# Altium PCB DIP2350.PcbDoc (part 1 of 2)
Units mm, origin at the board's own origin, x right, y up, seen from the top; angles counter-clockwise.
Board outline 25.4 x 81.28 mm, 4 copper layers (Top Layer, Layer 1, Layer 2, Bottom Layer), stack 1.586 mm thick; 85 components, 93 nets, 372 pads, 127 vias.
Unrouted connection lines stored in the file: 5.
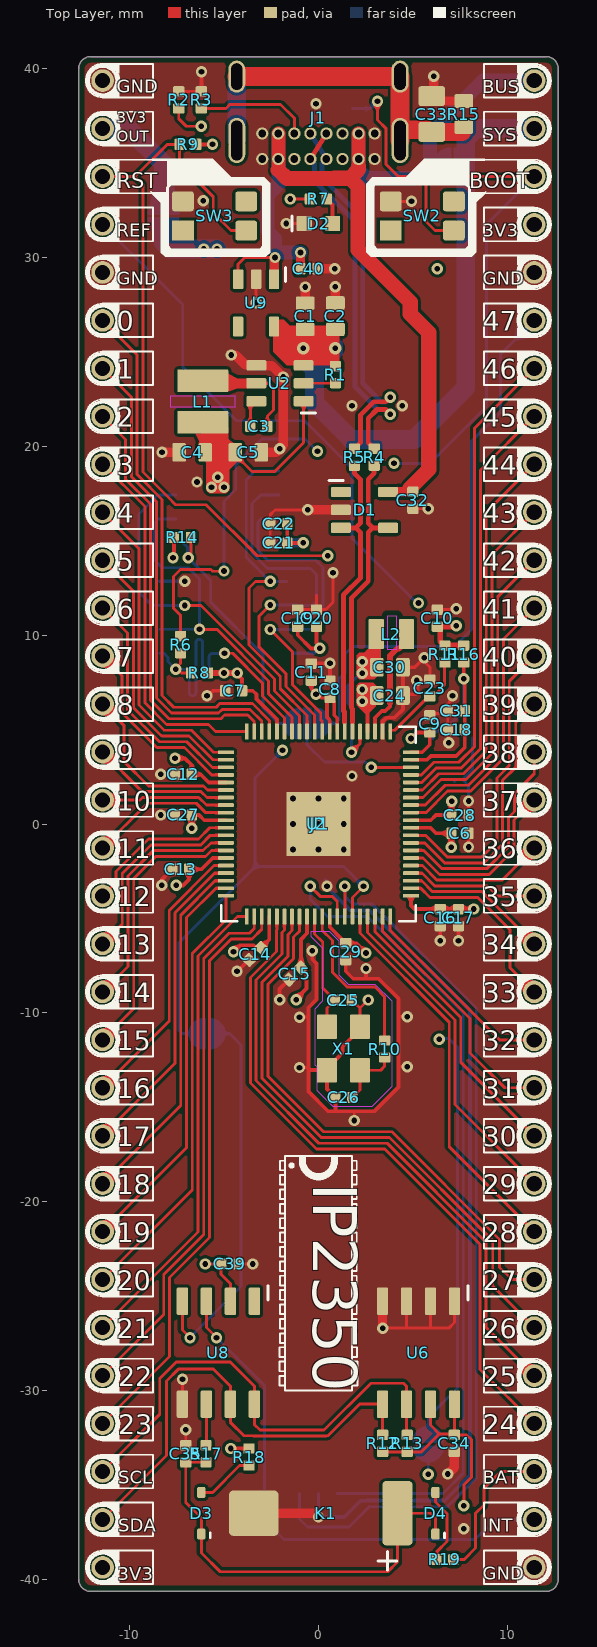
[diagram p0: Top Layer view]
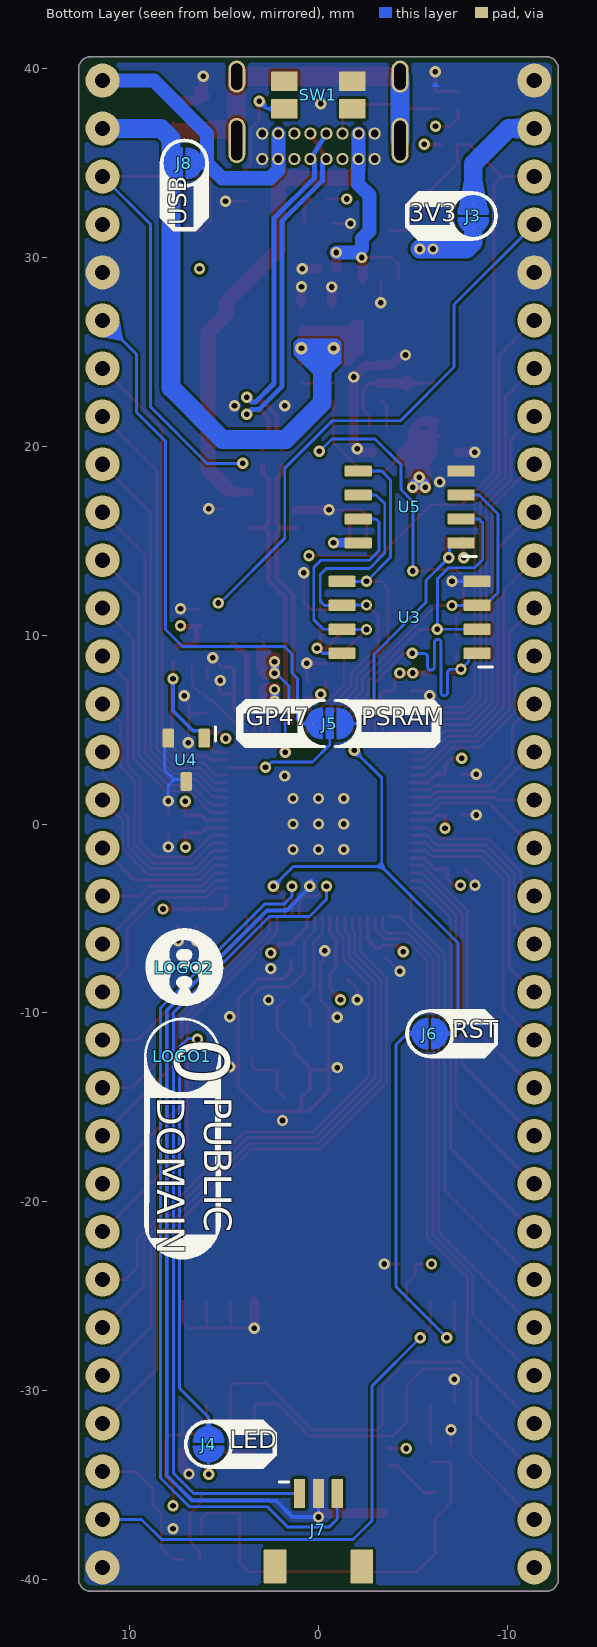
[diagram p1: Bottom Layer view, seen from below]
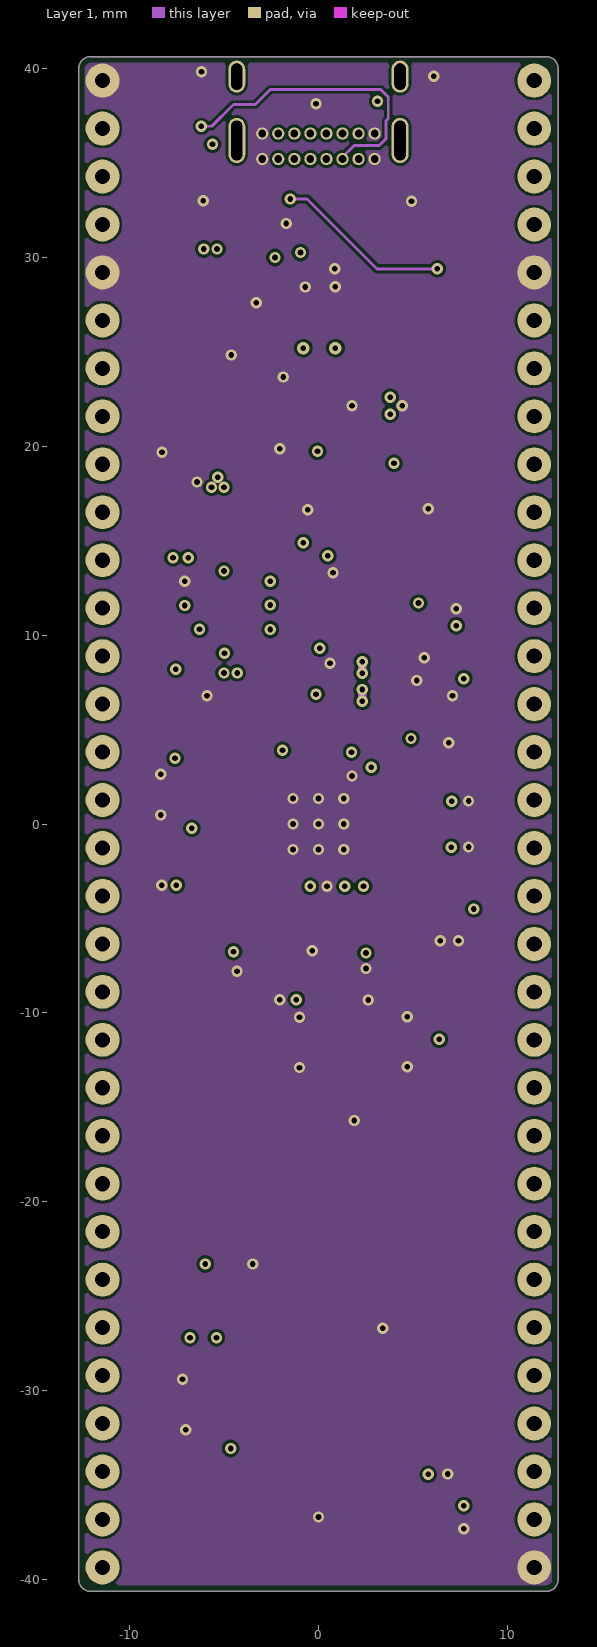
[diagram p2: Layer 1]
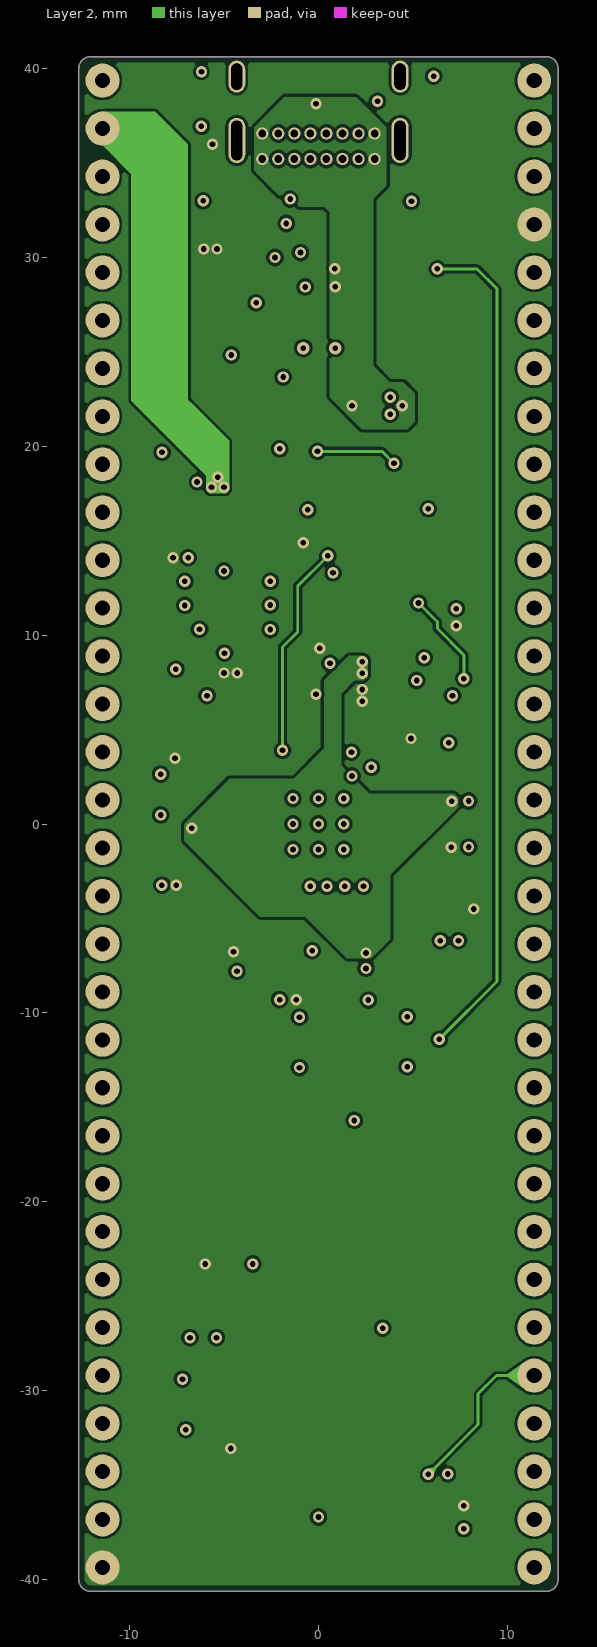
[diagram p3: Layer 2]
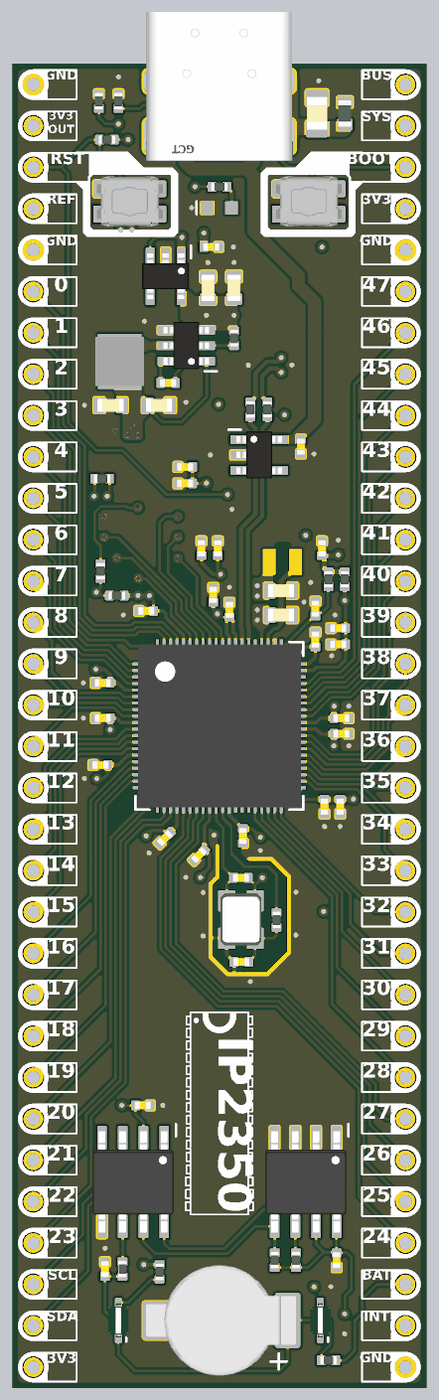
[diagram p5: 3D render of the assembled board from above, using the file's embedded part models]
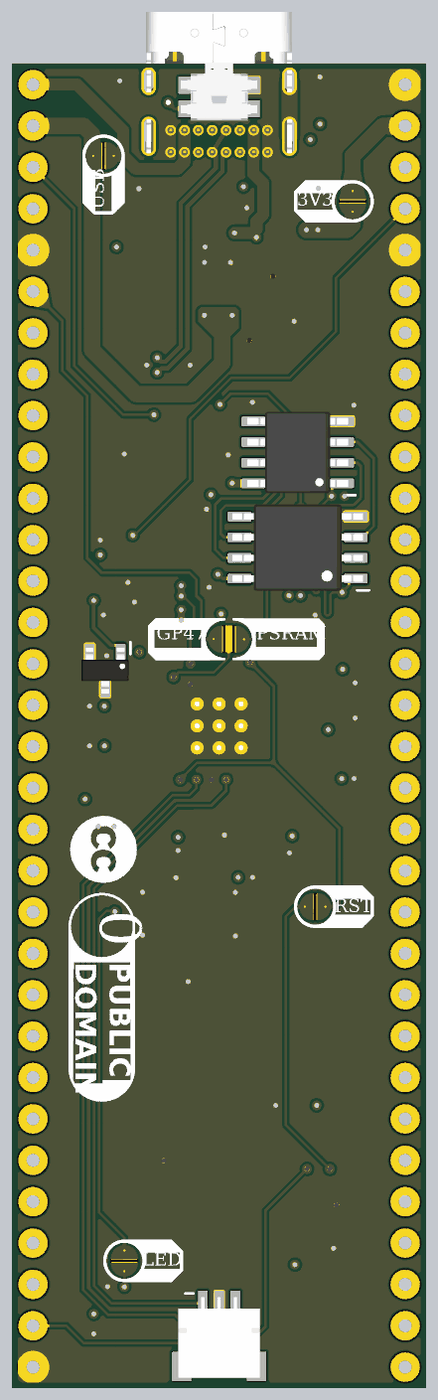
[diagram p6: 3D render of the assembled board from below, using the file's embedded part models]

## Layer stack, top to bottom
Top Solder: solder mask 0.01, Solder Resist, Dk 3.5
Top Layer: signal copper 0.035
Dielectric 2: prepreg 0.2104, 7628 * 1, Dk 4.1
Layer 1: signal copper 0.0152
Dielectric 1: dielectric 1.065, FR-4, Dk 4.8
Layer 2: signal copper 0.0152
Dielectric 3: prepreg 0.2104, 7628 * 1, Dk 4.1
Bottom Layer: signal copper 0.035
Bottom Solder: solder mask 0.01, Solder Resist, Dk 3.5

## Board outline
-12.7,-40.005 -12.7,40.005 cw(c-12.065,40.005) -12.065,40.64 12.065,40.64 cw(c12.065,40.005) 12.7,40.005 12.7,-40.005 cw(c12.065,-40.005) 12.065,-40.64 -12.065,-40.64 cw(c-12.065,-40.005)

## Design rules (kind name [scope] priority, off if disabled: settings)
Clearance Clearance_1 [All vs IsKeepOut] p1: gap=0.3 ignorepadtopadclearanceinfootprint=FALSE
Clearance [All] p2: gap=0.152 ignorepadtopadclearanceinfootprint=FALSE
ComponentClearance [All] p1 off: gap=0.254 collisioncheckmode=3 verticalgap=0.254 showdistances=FALSE
DiffPairsRouting [InDifferentialPairClass('USB')] p1: maxlimit=0.254 minlimit=0.152 mostfreqgap=0.254 toplayer_maxgap=0.152 toplayer_prefgap=0.152 toplayer_minwidth=0.152 toplayer_maxwidth=0.26 toplayer_prefwidth=0.26 bottomlayer_maxgap=0.152 bottomlayer_prefgap=0.152 bottomlayer_minwidth=0.152 bottomlayer_maxwidth=0.26 bottomlayer_prefwidth=0.26 impedanceprofiledriven=TRUE impedanceprofileid={392F3BA9-ACA7-47D8-8BB3-CF2CA6AB60A3} impedanceprofilevalue=90.000000 maxuncoupledlength=12.7
Length "Schematic Length Constraint" [InNetClass('QSPI')] p1: maxlimit=2540 minlimit=0 usedelayunits=TRUE mindelay=0.000000 maxdelay=500.000000
MatchedLengths "Schematic Matched Net Lengths" [InNetClass('QSPI')] p1: tolerance=2 checknetsindiffpair=FALSE checkdiffpairvsdiffpair=TRUE checkxsignals=TRUE checkothers=TRUE usedelayunits=TRUE delaytolerance=50.000000
MinimumSolderMaskSliver [All] p1: minsoldermaskwidth=0.099
PolygonConnect [All] p1: connectstyle=Direct reliefconductorwidth=0.254 reliefentries=4 polygonreliefangle="90 Angle" airgapwidth=0.254
RoutingVias [All] p1: holewidth=0.3 width=0.6 viastyle="Through Hole" minholewidth=0.2 minwidth=0.6 maxholewidth=2.54 maxwidth=3.81
SilkToSilkClearance [All] p1 off: silktosilkclearance=0.254
SilkToSolderMaskClearance [IsPad] p1: minsilkscreentomaskgap=0.05 clearancetoexposedcopper=TRUE
SolderMaskExpansion [All] p1: expansion=0.102 istentingtop=FALSE
SupplyNets "Schematic Supply Nets_9" [InNet('BOOT')] p1: voltage=0.000
SupplyNets "Schematic Supply Nets_8" [InNet('RST')] p2: voltage=0.000
SupplyNets "Schematic Supply Nets_4" [InNet('PSRAM')] p3: voltage=0.000
SupplyNets "Schematic Supply Nets_7" [InNet('P3V3')] p4: voltage=0.000
SupplyNets "Schematic Supply Nets_6" [InNet('VSYS')] p5: voltage=0.000
SupplyNets "Schematic Supply Nets_5" [InNet('VBUS')] p6: voltage=0.000
SupplyNets "Schematic Supply Nets" [InNet('SHLD')] p7: voltage=0.000
SupplyNets "Schematic Supply Nets_3" [InNet('GND')] p8: voltage=0.000
SupplyNets "Schematic Supply Nets_2" [InNet('P3V3OUT')] p9: voltage=0.000
SupplyNets "Schematic Supply Nets_1" [InNet('VREF')] p10: voltage=0.000
Width [All] p1: maxlimit=1 minlimit=0.152 preferedwidth=0.152
25 further rules are at their usual default settings.

## Classes and differential pairs
net class USB: P_N P_P U_N U_P
differential pair class USB: P U
net class QSPI: QCLK QSD0 QSD1 QSD2 QSD3 QSS
differential pair U: +U_P -U_N
differential pair P: +P_P -P_N

## Components (designator, comment, footprint, x,y, rotation, side; value= is the part's Value field where it differs from the comment)
C1 "CAP0603" CAPC0603 -0.7,26.89 r90 top
C2 "CAP0603" CAPC0603 0.9,26.9 r90 top
C3 "CAP0402" CAPC0402 -3.153,21.053 r180 top
C4 "CAP0603" CAPC0603 -6.684,19.682 r180 top
C5 "CAP0603" CAPC0603 -3.712,19.682 r0 top
C6 "CAP0402" CAPC0402 7.495,-0.489 r0 top locked
C7 "CAP0402" CAPC0402 -4.494,7.058 r180 top
C8 "CAP0402" CAPC0402 0.612,7.131 r90 top
C9 "CAP0402" CAPC0402 5.9,5.3 r90 top
C10 "CAP0402" CAPC0402 6.3,10.9 r90 top
C11 "CAP0402" CAPC0402 -0.379,8.046 r90 top
C12 "CAP0402" CAPC0402 -7.161,2.638 r180 top locked
C13 "CAP0402" CAPC0402 -7.3,-2.4 r180 top
C14 "CAP0402" CAPC0402 -3.351,-6.887 r225 top
C15 "CAP0402" CAPC0402 -1.242,-7.928 r225 top locked
C16 "CAP0402" CAPC0402 6.451,-4.956 r270 top
C17 "CAP0402" CAPC0402 7.416,-4.956 r270 top
C18 "CAP0402" CAPC0402 7.3,5 r180 top
C19 "CAP0402" CAPC0402 -1.1,10.9 r90 top
C20 "CAP0402" CAPC0402 -0.1,10.9 r90 top
C21 "CAP0402" CAPC0402 -2.101,14.884 r180 top
C22 "CAP0402" CAPC0402 -2.1,15.9 r180 top
C23 "CAP0402" CAPC0402 5.9,7.2 r90 top
C24 "CAP0603" CAPC0603 3.787,6.804 r0 top
C25 "CAP0603" CAPC0402 1.323,-9.325 r0 top locked
C26 "CAP0603" CAPC0402 1.348,-14.481 r180 top locked
C27 "CAP0402" CAPC0402 -7.161,0.479 r180 top locked
C28 "CAP0402" CAPC0402 7.495,0.476 r0 top locked
C29 "CAP0402" CAPC0402 1.45,-6.76 r270 top locked
C30 "CAP0603" CAPC0603 3.787,8.303 r0 top
C31 "CAP0402" CAPC0402 7.3,6 r180 top
C32 "CAP0402" CAPC0402 5.004,17.145 r270 top
C33 "CAP0805" CAPC0805 6,37.6 r90 top
C34 "CAP0402" CAPC0402 7.2,-32.8 r270 top
C35 "CAP0402" CAPC0402 -7.025,-33.35 r90 top
C39 "CAP0402" CAPC0402 -4.7,-23.3 r0 top
C40 "CAP0402" CAPC0402 -0.5,29.4 r0 top
D1 "TVS-WURTH-824011" SOT23-5 2.441,16.634 r0 top
D2 "BLUE" LED-0603-BLUE 0,31.8 r180 top
D3 "BAV116DW" SOD323 -6.2,-36.5 r90 top
D4 "BAV116DW" SOD323 6.2,-36.5 r90 top
J1 "CONN-USBC-USB2-HOR" CONN-GCT-USB4085 0,39.243 r180 top
J2 "CONN-DIP64-SOCKET" CONN-DIP64-SOCKET 0,0 r0 top locked
J3 "SOLDERPAD-2" SOLDERPAD-2 -8.2,32.2 r90 bottom
J4 "SOLDERPAD-2" SOLDERPAD-2 5.817,-32.842 r270 bottom
J5 "SOLDERPAD-3" SOLDERPAD-3 -0.6,5.321 r180 bottom
J6 "SOLDERPAD-2" SOLDERPAD-2 -5.9,-11.1 r0 bottom
J7 "SM03B" CONN-JST-SM03B-SRSS-TB 0,-37.9 r180 bottom
J8 "SOLDERPAD-2" SOLDERPAD-2 7.1,35 r180 bottom
K1 "MS621R" BAT-SEIKO-MS621R 0,-36.5 r180 top
L1 "4.7uH" IND-ABRACON-ASPI-3012S-3R9N-T -6.125,22.374 r270 top value=4u7H
L2 "AOTA-B201610S3R3-101-T" IND-ABRACON-B201610S3R3-101-T 3.863,10.055 r0 top value=3u3
LOGO1 "LOGO-LICENSE-CC0-PUBLIC" LOGO-LICENSE-CC0-PUBLIC 7.2,-12.3 r270 bottom
LOGO2 "LOGO-LICENSE-CC" LOGO-LICENSE-CC 7.1,-7.6 r270 bottom
R1 "RESC0402" RESC0402 0.9,23.8 r90 top value=1K
R2 "RESC0402" RESC0402 -7.4,38.35 r90 top value=5K1
R3 "RESC0402" RESC0402 -6.2,38.35 r90 top value=5K1
R4 "RESC0402" RESC0402 2.953,19.431 r270 top value=27R
R5 "RESC0402" RESC0402 1.907,19.428 r270 top value=27R
R6 "RESC0402" RESC0402 -7.3,9.5 r270 top value=1K
R7 "RESC0402" RESC0402 0,33.1 r0 top value=1K
R8 "RESC0402" RESC0402 -6.3,8 r0 top value=10K
R9 "RESC0402" RESC0402 -6.909,35.992 r0 top value=10K
R10 "RESC0402" RESC0402 3.507,-11.916 r90 top locked value=1K
R11 "RESC0402" RESC0402 6.7,9 r270 top value=33R
R12 "RESC0402" RESC0402 3.4,-32.8 r90 top value=4K7
R13 "RESC0402" RESC0402 4.7,-32.8 r90 top value=4K7
R14 "RESC0402" RESC0402 -7.2,15.175 r180 top value=10K
R15 "RESC0603" RESC0603 7.7,37.6 r90 top value=1M
R16 "RESC0402" RESC0402 7.7,9 r90 top value=33R
R17 "RESC0402" RESC0402 -5.95,-33.35 r270 top value=1K
R18 "RESC0402" RESC0402 -3.675,-33.525 r90 top value=1K
R19 "RESC0402" RESC0402 6.7,-38.95 r0 top value=1K
SW1 "SWITCH-E-SWITCH-TL1016" SWITCH-ESWITCH-TL1016 0,38.608 r0 bottom
SW2 "SWITCH-PANASONIC-EVP-AA202K" SWITCH-PANASONIC-EVP-AA202K 5.5,32.2 r0 top
SW3 "SWITCH-PANASONIC-EVP-AA202K" SWITCH-PANASONIC-EVP-AA202K -5.5,32.2 r0 top locked
U1 "IC-RP2350-DIP64" QFN40P1000X1000X90_HS-81N 0,0 r0 top locked
U2 "AP63203Q" SOT23-6 -2.036,23.339 r180 top
U3 "W25Q128JVSIQ" SO127P790-8N -4.826,10.947 r0 bottom locked
U4 "LM4040-3.0" SOT23 7,3.4 r270 bottom
U5 "APS6404L-3SQR-SN" SO127P600-8N -4.826,16.789 r0 bottom locked
U6 "FM24C64B-GTR" SO127P600-8N 5.3,-28 r270 top
U8 "DS3231M" SO127P600-8N -5.3,-28 r270 top
U9 "XC8110" SOT23-5 -3.3,27.6 r270 top
X1 "ABM8-272-T3" XTAL-ABRACON-ABM8-272-T3 1.323,-11.89 r0 top locked

## Footprints (in the part's own frame and the unit in brackets; to place one, negate y for a bottom-side part, rotate by r counter-clockwise, add the part's x,y. Pads: shape width x height; smd on the part's side, far side on the other; paste and mask are expansions set on the pad)
BAT-SEIKO-MS621R [mm]
  rrect25% 1.6x3.4 smd mask+0.05: 1(-4.187,0)
  rrect16% 2.6x2.4 smd mask+0.05: 2(3.425,0)
  silkscreen extent -4.15,2.02 -3.15,3.02, body extent -4.7,-3.4 4.5,3.4, height 2.57
CAPC0402 [mm] "CAPACITOR, CHIP 0402 (1005) 0.5MM THICK"
  rrect25% 0.55x0.6 smd paste+0 mask+0.075: 1(-0.45,0) 2(0.45,0)
  body extent -0.51,-0.25 0.51,0.26, height 0.52
CAPC0603 [mm] "CAPACITOR, CHIP 0603 (1608) 0.5MM THICK"
  rrect25% 0.72x0.99 smd paste+0 mask+0.075: 1(-0.69,0) 2(0.69,0)
  body extent -0.81,-0.41 0.81,0.41, height 0.51
CAPC0805 [mm] "CAPACITOR, CHIP 0805 (2012) 0.85MM THICK"
  rrect25% 1.05x1.4 smd paste+0 mask+0.075: 1(-0.95,0) 2(0.95,0)
  body extent -1.01,-0.63 1.01,0.64, height 0.86
CONN-DIP64-SOCKET [mm]
  round 1.2 / inner round 1.8 / far side round 1.8 hole 0.8 paste-2539.97 mask+0.1: 1(-11.43,39.37) 2(-11.43,36.83) 3(-11.43,34.29) 4(-11.43,31.75) 5(-11.43,29.21) 6(-11.43,26.67) 7(-11.43,24.13) 8(-11.43,21.59) 9(-11.43,19.05) 10(-11.43,16.51) 11(-11.43,13.97) 12(-11.43,11.43) 13(-11.43,8.89) 14(-11.43,6.35) 15(-11.43,3.81) 16(-11.43,1.27) 17(-11.43,-1.27) 18(-11.43,-3.81) 19(-11.43,-6.35) 20(-11.43,-8.89) 21(-11.43,-11.43) 22(-11.43,-13.97) 23(-11.43,-16.51) 24(-11.43,-19.05) 25(-11.43,-21.59) 26(-11.43,-24.13) 27(-11.43,-26.67) 28(-11.43,-29.21) 29(-11.43,-31.75) 30(-11.43,-34.29) 31(-11.43,-36.83) 32(-11.43,-39.37) 33(11.43,-39.37) 34(11.43,-36.83) 35(11.43,-34.29) 36(11.43,-31.75) 37(11.43,-29.21) 38(11.43,-26.67) 39(11.43,-24.13) 40(11.43,-21.59) 41(11.43,-19.05) 42(11.43,-16.51) 43(11.43,-13.97) 44(11.43,-11.43) 45(11.43,-8.89) 46(11.43,-6.35) 47(11.43,-3.81) 48(11.43,-1.27) 49(11.43,1.27) 50(11.43,3.81) 51(11.43,6.35) 52(11.43,8.89) 53(11.43,11.43) 54(11.43,13.97) 55(11.43,16.51) 56(11.43,19.05) 57(11.43,21.59) 58(11.43,24.13) 59(11.43,26.67) 60(11.43,29.21) 61(11.43,31.75) 62(11.43,34.29) 63(11.43,36.83) 64(11.43,39.37)
CONN-GCT-USB4085 [mm]
  rrect100% 0.9x2.4 hole 2.1 slot 0.6 at 0 deg paste-2539.97 mask+0: 1(-4.325,3.045) 2(4.325,3.045)
  rrect100% 0.9x1.7 hole 1.4 slot 0.6 at 0 deg paste-2539.97 mask+0: 3(-4.325,-0.335) 4(4.325,-0.335)
  round 0.65 hole 0.4 paste-2539.97 mask+0: A1(-2.975,4.025) A4(-2.125,4.025) A5(-1.275,4.025) A6(-0.425,4.025) A7(0.425,4.025) A8(1.275,4.025) A9(2.125,4.025) A12(2.975,4.025) B1(2.975,2.675) B4(2.125,2.675) B5(1.275,2.675) B6(0.425,2.675) B7(-0.425,2.675) B8(-1.275,2.675) B9(-2.125,2.675) B12(-2.975,2.675)
  body extent -4.87,-4.83 4.87,4.83, height 0.25
CONN-JST-SM03B-SRSS-TB [mm]
  rrect16% 0.6x1.55 smd mask+0.05: 1(-1,2.45) 2(0,2.45) 3(1,2.45)
  rrect8% 1.2x1.8 smd mask+0.05: MP1(-2.3,-1.425) MP2(2.3,-1.425)
  silkscreen extent -2.07,3.05 -1.58,3.05, body extent -2.5,-2.13 2.5,2.82, height 3.25
IND-ABRACON-ASPI-3012S-3R9N-T [mm]
  rrect8% 1.2x2.7 smd mask+0.05: 1(-1.1,0) 2(1.1,0)
  Top Layer keep-out region: -0.3,1.7 0.3,1.7 0.3,-1.7 -0.3,-1.7
  body extent -1.5,-1.5 1.5,1.5, height 1.51
IND-ABRACON-B201610S3R3-101-T [mm]
  rrect12% 0.8x1.6 smd paste-2539.97 mask+0.05: 1(-0.8,0) 2(0.8,0)
LED-0603-BLUE [mm]
  rrect12% 0.8x0.8 smd paste+0 mask+0.05: 1(0.75,0) 2(-0.75,0)
  silkscreen extent 1.4,-0.4 1.4,0.4, body extent -0.8,-0.4 0.8,0.4, height 0.9
LOGO-LICENSE-CC [mm]
  silkscreen extent -2.08,-2.05 2.03,2.05
LOGO-LICENSE-CC0-PUBLIC [mm]
  silkscreen extent -1.97,-1.98 10.7,1.98
QFN40P1000X1000X90_HS-81N [mm] "QFN, 80-Leads, Body 10.00x10.00mm, Pitch 0.40mm, Thermal Pad 3.40x3.40mm, IPC Medium Density"
  rrect50% 0.85x0.2 smd mask+0.05: 1(-4.9,3.8) 2(-4.9,3.4) 3(-4.9,3) 4(-4.9,2.6) 5(-4.9,2.2) 6(-4.9,1.8) 7(-4.9,1.4) 8(-4.9,1) 9(-4.9,0.6) 10(-4.9,0.2) 11(-4.9,-0.2) 12(-4.9,-0.6) 13(-4.9,-1) 14(-4.9,-1.4) 15(-4.9,-1.8) 16(-4.9,-2.2) 17(-4.9,-2.6) 18(-4.9,-3) 19(-4.9,-3.4) 20(-4.9,-3.8) 41(4.9,-3.8) 42(4.9,-3.4) 43(4.9,-3) 44(4.9,-2.6) 45(4.9,-2.2) 46(4.9,-1.8) 47(4.9,-1.4) 48(4.9,-1) 49(4.9,-0.6) 50(4.9,-0.2) 51(4.9,0.2) 52(4.9,0.6) 53(4.9,1) 54(4.9,1.4) 55(4.9,1.8) 56(4.9,2.2) 57(4.9,2.6) 58(4.9,3) 59(4.9,3.4) 60(4.9,3.8)
  rrect50% 0.2x0.85 smd mask+0.05: 21(-3.8,-4.9) 22(-3.4,-4.9) 23(-3,-4.9) 24(-2.6,-4.9) 25(-2.2,-4.9) 26(-1.8,-4.9) 27(-1.4,-4.9) 28(-1,-4.9) 29(-0.6,-4.9) 30(-0.2,-4.9) 31(0.2,-4.9) 32(0.6,-4.9) 33(1,-4.9) 34(1.4,-4.9) 35(1.8,-4.9) 36(2.2,-4.9) 37(2.6,-4.9) 38(3,-4.9) 39(3.4,-4.9) 40(3.8,-4.9) 61(3.8,4.9) 62(3.4,4.9) 63(3,4.9) 64(2.6,4.9) 65(2.2,4.9) 66(1.8,4.9) 67(1.4,4.9) 68(1,4.9) 69(0.6,4.9) 70(0.2,4.9) 71(-0.2,4.9) 72(-0.6,4.9) 73(-1,4.9) 74(-1.4,4.9) 75(-1.8,4.9) 76(-2.2,4.9) 77(-2.6,4.9) 78(-3,4.9) 79(-3.4,4.9) 80(-3.8,4.9)
  rrect2% 3.4x3.4 smd paste-5 mask+0.05: 81(0,0)
  silkscreen extent -5.15,-5.15 5.15,5.15, body extent -5.01,-5.01 5.01,5.01, height 0.9
RESC0402 [mm] "RESISTOR, CHIP 0402 (1005)"
  rrect25% 0.55x0.6 smd paste+0 mask+0.075: 1(-0.45,0) 2(0.45,0)
  body extent -0.5,-0.25 0.5,0.25, height 0.27
RESC0603 [mm] "RESISTOR, CHIP 0603 (1608)"
  rrect25% 0.72x0.99 smd paste+0 mask+0.075: 1(-0.69,0) 2(0.69,0)
  body extent -0.8,-0.4 0.8,0.4, height 0.37
SO127P600-8N [mm] "SO8"
  rrect25% 1.45x0.6 smd mask+0.075: 1(-2.725,1.905) 2(-2.725,0.635) 3(-2.725,-0.635) 4(-2.725,-1.905) 5(2.725,-1.905) 6(2.725,-0.635) 7(2.725,0.635) 8(2.725,1.905)
  silkscreen extent -3.55,2.62 -2.8,2.63, body extent -3.1,-2.5 3.1,2.5, height 1.75
SO127P790-8N [mm] "SO8"
  rrect25% 1.45x0.6 smd mask+0.075: 1(-3.575,1.905) 2(-3.575,0.635) 3(-3.575,-0.635) 4(-3.575,-1.905) 5(3.575,-1.905) 6(3.575,-0.635) 7(3.575,0.635) 8(3.575,1.905)
  silkscreen extent -4.4,2.63 -3.65,2.63, body extent -4,-2.65 4,2.65, height 2.16
SOD323 [mm] "SOD323 FIGURE"
  rrect44% 0.59x0.45 smd paste+0 mask+0.05: 1(-1.1,0) 2(1.1,0)
  silkscreen extent -1.3,-0.48 -1.05,-0.48, body extent -1.25,-0.62 1.25,0.62, height 1.1
SOLDERPAD-2 [mil]
  round 1 smd paste-99999 mask+2: 1(-25,0) 2(25,0)
  Top Layer region: 38.09,0 35.6,-12.5 28.52,-23.11 17.91,-30.19 5.41,-32.68 5.41,-32.68 4.49,-32.49 3.71,-31.97 3.18,-31.19 3,-30.27 3,-30.27 3,30.27 3.18,31.19 3.71,31.97 4.49,32.49 5.41,32.68 5.41,32.68 17.91,30.19 28.52,23.11 35.6,12.51 38.09,0
  Top Layer region: -38.09,0 -35.6,-12.51 -28.52,-23.11 -17.91,-30.19 -5.41,-32.68 -5.41,-32.68 -4.49,-32.49 -3.71,-31.97 -3.18,-31.19 -3,-30.27 -3,-30.27 -3,30.27 -3.18,31.19 -3.71,31.97 -4.49,32.49 -5.41,32.68 -5.41,32.68 -17.91,30.19 -28.52,23.11 -35.6,12.5 -38.09,0
SOLDERPAD-3 [mil]
  round 1 smd paste-99999 mask+2: 1(-36.62,0.25) 2(0,0) 3(36.62,-0.25)
  Top Layer region: 49.7,-0.25 47.21,-12.75 40.13,-23.35 29.53,-30.44 17.02,-32.93 17.02,-32.93 16.1,-32.74 15.32,-32.22 14.8,-31.44 14.62,-30.52 14.62,-30.52 14.62,30.02 14.8,30.94 15.32,31.72 16.1,32.25 17.02,32.43 17.02,32.43 29.53,29.94 40.13,22.86 47.21,12.26 49.7,-0.25
  Top Layer region: -49.7,0.25 -47.21,-12.26 -40.13,-22.86 -29.53,-29.94 -17.02,-32.43 -17.02,-32.43 -16.1,-32.25 -15.32,-31.72 -14.8,-30.94 -14.62,-30.02 -14.62,-30.02 -14.62,30.52 -14.8,31.44 -15.32,32.22 -16.1,32.74 -17.02,32.93 -17.02,32.93 -29.53,30.44 -40.13,23.35 -47.21,12.75 -49.7,0.25
  Top Layer region: -8.62,31.25 -8.48,31.92 -8.1,32.49 -7.53,32.87 -6.86,33 -6.86,33 6.63,33 7.3,32.87 7.87,32.49 8.25,31.92 8.38,31.25 8.38,31.25 8.38,-29.62 8.2,-30.53 7.69,-31.3 6.91,-31.82 6,-32 6,-32 -6.37,-32 -7.23,-31.83 -7.96,-31.34 -8.44,-30.61 -8.62,-29.75 -8.62,-29.75
SOT23 [mm] "SOT23 PACKAGE, 3 PIN"
  rrect25% 1x0.6 smd paste+0 mask+0.075: 1(-1.15,0.95) 2(-1.15,-0.95) 3(1.15,0)
  silkscreen extent -1.75,1.55 -1,1.55, body extent -1.4,-1.45 1.4,1.45, height 1.3
SOT23-5 [mm] "SOT23 PACKAGE, 5 PIN (SOT25)"
  rrect25% 1.05x0.55 smd paste+0 mask+0.075: 1(-1.25,0.95) 2(-1.25,0) 3(-1.25,-0.95) 4(1.25,-0.95) 5(1.25,0.95)
  silkscreen extent -1.88,1.55 -1.12,1.55, body extent -1.4,-1.46 1.4,1.44, height 1.45
SOT23-6 [mm] "SOT23 PACKAGE, 6 PIN (SOT26)"
  rrect25% 1.05x0.55 smd paste+0 mask+0.05: 1(-1.25,0.95) 2(-1.25,0) 3(-1.25,-0.95) 4(1.25,-0.95) 5(1.25,0) 6(1.25,0.95)
  silkscreen extent -1.88,1.58 -1.12,1.58, body extent -1.4,-1.45 1.4,1.45, height 1.45
SWITCH-ESWITCH-TL1016 [mm]
  rrect9% 1.4x1.05 smd paste+0 mask+0.05: 1(-1.8,0.725) 2(1.8,0.725) 3(-1.8,-0.725) 4(1.8,-0.725)
  body extent -2.35,-2.1 2.35,1.45, height 1.36
SWITCH-PANASONIC-EVP-AA202K [mm] "SWITCH-PANASONIC-EVP-AA202K"
  rect 1.15x1.05 smd mask+0.075: 1(-1.675,-0.775)
  rrect25% 1.15x1.05 smd mask+0.075: 2(1.675,-0.775) 3(1.675,0.775) 4(-1.675,0.775)
  body extent -2.15,-1.55 2.15,1.55, height 1.71
XTAL-ABRACON-ABM8-272-T3 [mm] "ABM8-272-T3"
  rrect9% 1.05x1.3 smd mask+0.05: 1(-0.875,1.15) 2(-0.875,-1.15) 3(0.875,-1.15) 4(0.875,1.15)
  body extent -1.25,-1.6 1.25,1.6, height 0.7

## Part data
C1 C2 C4 C5: library part CAPC-0603-22uF-16V-X5R, "CAPACITOR,CERAMIC,22uF,16V,X5R,0603", Capacitance=22uF, Dielectric=X5R, LCSC=C2762594, Package / Case=0603, Supplier Part Number 1=1276-7076-1-ND, Voltage=16V, Supplier 1=Digikey
C3 C6 C7 C8 C9 C10 C12 C13 C14 C15 C16 C18 C20 C22 C27 C28 C32 C34 C35 C39: library part CAPC-0402-100nF-16V-X7R, "CAPACITOR,CERAMIC,100nF,16V,X7R,0402", Capacitance=100nF, Dielectric=X7R, LCSC=C60474, Package / Case=0402, Supplier Part Number 1=1292-1630-1-ND, Voltage=16V, Supplier 1=Digikey
C11 C17 C19 C21 C23 C29 C31 C40: library part CAPC-0402-4u7-10V-X5R, "CAPACITOR,CERAMIC,4u7,10V,X5R,0402", Capacitance=4u7, Dielectric=X5R, LCSC=C1705, Package / Case=0603, Supplier Part Number 1=1276-1482-1-ND, Voltage=10V, Supplier 1=Digikey
C24 C30: library part CAPC-0603-4u7-10V-X5R, "CAPACITOR,CERAMIC,4u7,10V,X5R,0603", Capacitance=4u7, Dielectric=X5R, LCSC=C1705, Package / Case=0603, Supplier Part Number 1=GRM188Z71A475KE15J, Voltage=10V, Supplier 1="Arrow Electronics"
C25 C26: library part CAPC-0402-15PF-50V-C0G, "CAPACITOR,CERAMIC,15pF,50V,C0G,0402", Capacitance=15pF, Dielectric=C0G, LCSC=C3906764, Package / Case=0402, Supplier Part Number 1=311-3780-1-ND, Voltage=50V, Supplier 1=Digikey
C33: library part CAPC-0805-10nF-200V-ESD, "CAPACITOR,CERAMIC,10nF,200V,X7R,0805 (2012),ESD", Capacitance=10nF, Dielectric=X7R, LCSC=C36911368, Package / Case="0805 (2012 metric)", Supplier Part Number 1=80-C0805C103K2RECAUT, Voltage=200V, Supplier 1=Mouser
D1: "DIODE,TVS,DUAL,UNIDIRECTIONAL,USB", LCSC=C22358704, Supplier Part Number 1=732-4465-1-ND, Supplier 1=Digikey
D2: library part LED-WURTH-150060BS75000, "LED,BLUE,0603", LCSC=C965807, Supplier Part Number 1=732-4966-1-ND, Supplier 1=Digikey
D3 D4: library part DIODE-DIODES-BAV116WS, "DIODE,75V,215mA,SOD323,LOW LEAKAGE", LCSC=C459842, Supplier Part Number 1=BAV116WS-7, Supplier 1="Arrow Electronics"
J1: "CONN,USB-C,16P,RA,TH,8.94X9.17", LCSC=C36936564, Supplier Part Number 1=2073-USB4085-GF-ACT-ND, Supplier 1=Digikey
J7: library part CONN-JST-SM03B-SRSS-TB, "CONN,1X3,1MM,RA,SMD,JST,SM03B", LCSC=C160403, Supplier Part Number 1=4483905, Supplier 1="Future Electronics"
K1: library part BAT-SEIKO-MS621R, "BAT,3V,SMD,SEIKO MS621R", Supplier Part Number 1=728-MS621RII27ECT-ND, Supplier 1=Digikey
L1: library part IND-TAIYO-NRH3012T4R7MN, "IND,4.7uH,1.06A,3X3, NRH3012T4R7MN", LCSC=C5159666, Supplier Part Number 1=587-2591-1-ND, Supplier 1=Digikey
L2: library part IND-ABRACON-AOTA-B201610S3R3-101-T, "IND,3U3,RP2350, ABRACON AOTA-B201610S3R3-101-T", LCSC=C42411119, Supplier Part Number 1=815-AB201610S3R3101T, Supplier 1=Mouser
R1 R6 R7 R10 R17 R18 R19: library part RESC-0402-1K-1%-1/10W, "RESISTOR,1K,1%,63mW,0402 (1005)", LCSC=C106235, Power=1/16W, Supplier Part Number 1=7825607, Tolerance=1%, Supplier 1="Future Electronics"
R2 R3: library part RESC-0402-5K1-1%-1/10W, "RESISTOR,5K1,1%,63mW,0402 (1005)", LCSC=C105872, Power=1/16W, Supplier Part Number 1=6053649, Tolerance=1%, Supplier 1="Future Electronics"
R4 R5: library part RESC-0402-27R-1%-1/10W, "RESISTOR,27R,1%,63mW,0402 (1005)", LCSC=C138021, Power=1/16W, Supplier Part Number 1=2577120, Tolerance=1%, Supplier 1="Future Electronics"
R8 R9 R14: library part RESC-0402-10K-1%-1/10W, "RESISTOR,10K,1%,63mW,0402 (1005)", LCSC=C60490, Power=1/16W, Supplier Part Number 1=3388022, Tolerance=1%, Supplier 1="Future Electronics"
R11 R16: library part RESC-0402-33R-1%-1/10W, "RESISTOR,33R,1%,63mW,0402 (1005)", LCSC=C138002, Power=1/16W, Supplier Part Number 1=8177883, Tolerance=1%, Supplier 1="Future Electronics"
R12 R13: library part RESC-0402-4K7-1%-1/10W, "RESISTOR,4K7,1%,63mW,0402 (1005)", LCSC=C105871, Power=1/16W, Supplier Part Number 1=3795218, Tolerance=1%, Supplier 1="Future Electronics"
R15: library part RESC-0603-1M-1%-1/10W, "RESISTOR,1M,1%,100mW,0603 (1608)", LCSC=C105578, Power=1/10W, Supplier Part Number 1=2912863, Tolerance=1%, Supplier 1="Future Electronics", Supplier 2=Mouser, Supplier 3=Avnet, Supplier Part Number 2=667-ERJ-3EKF1004V, Supplier Part Number 3=6-2176339-1
SW1: "SW,SMD,TACT,4PIN,2.9X3.5,4PIN,SIDE ACTUATOR", LCSC=C483790, Supplier Part Number 1=141-TL1016AAF160QGCT-ND, Supplier 1=Digikey
SW2 SW3: "SW,SMD,TACT,4PIN,2.9X3.5,4PIN", LCSC=C483888, Supplier Part Number 1=667-EVP-AA202K, Supplier 1=Mouser
U1: "IC,CPU,RP2350B,QFN80", LCSC=C42415655
U2: library part IC-DIODES-AP63203Q, "IC,PMIC,STEP-DOWN, 2A 3.3V", LCSC=C780769, Supplier Part Number 1=31-AP63203QWU-7CT-ND, Supplier 1=Digikey
U3: library part IC-WINBOND-W25Q128JVSIQ, "IC,FLASH,QSPI,16Mx8", LCSC=C97521, Supplier Part Number 1=W25Q128JVSIQCT-ND, Supplier 1=Digikey
U4: library part IC-TI-LM4040-3, "IC,VOLTAGE REFERENCE,3.0V", LCSC=C460608, Supplier Part Number 1=926-LM4040AIM330NOPB, Supplier 1=Mouser
U5: library part IC-APMEMORY-APS6404L-3SQR-SN, "IC,PSRAM,QSPI,8Mx8,SO8", LCSC=C5333729, Supplier Part Number 1=878-APS6404L-3SQR-SN, Supplier 1=Mouser
U6: library part IC-INFINEON-FM24C64B-GTR, "IC,FRAM,I2C, 64KBIT", LCSC=C914923, Supplier 1="Arrow Electronics", Supplier Part Number 1=FM24C64B-GTR
U8: library part IC-ANALOG-DS3231M, "IC,RTC,I2C,DS3231M", LCSC=C107410, Supplier Part Number 1=700-DS3231MZ+TRL, Supplier 1=Mouser
U9: library part IC-TOREX-XC8110, "IC,PMIC,IDEAL DIODE ORING CONTROLLER", LCSC=C3235547, Supplier Part Number 1=893-XC8110AA01MR-GCT-ND, Supplier 1=Digikey
X1: library part XTAL-ABRACON-ABM8-272-T3, "XTAL,12MHZ,RP2350", LCSC=C20625731, Supplier Part Number 1=815-ABM8-272-T3, Supplier 1=Mouser

## Via types
v1: diameter 0.6, hole 0.3, Top Layer to Bottom Layer, tented both sides, 116 vias
v2: diameter 0.6, hole 0.3, Top Layer to Bottom Layer, 9 vias
v3: diameter 0.66, hole 0.3, Top Layer to Bottom Layer, tented both sides, 2 vias

## Nets (pads, with @x,y where several pads share a name; then routed paths per layer and width w, separated by ;. In a path a pad name is that pad's centre, name@x,y a point inside that pad or via, vN(x,y) a via of type N, cw(c..) or ccw(c..) an arc to the next point about the centre after c; other vN are vias at no path point)
BOOT: J2.62 R6.1 SW1.2 SW2.2 | length 58.9
  Top Layer w0.152: R6.1@-7.3,9.95 -7.3,11.052 -7.675,11.427 -7.675,13.1 -7.3,13.475 -5.689,13.475 -5.6,13.386 -5.014,13.386 v1(-5,13.4) ; v1(3.126,38.275) 3.126,37.283 3.588,36.822 3.588,34.929 4.227,34.29 5.7,34.29 ; SW2.2@6.875,31.675 SW2.2@6.625,31.425 ; SW2.2@6.9,31.7 SW2.2@7.175,31.425 SW2.2@6.625,31.425 ; J2.62@11.43,34.29 5.7,34.29 ; 5.7,34.29 5.7,31.9 6.175,31.425 SW2.2@6.625,31.425
  Layer 2 w0.152: v1(-0.051,19.736) 3.364,19.736 v1(4,19.1)
  Bottom Layer w0.152: v1(-5,13.4) -5,17.087 -4.375,17.712 -4.375,19.024 -3.003,20.396 -0.711,20.396 v1(-0.051,19.736) ; SW1.2@1.8,37.883 2.735,37.883 v1(3.126,38.275) ; v1(4,19.1) 5.9,19.1 8.9,22.1 8.9,31.76 J2.62@11.43,34.29
EXTVBAT: J2.35 R19.2 | length 7.8
  Top Layer w0.152: R19.2@7.15,-38.95 7.725,-38.95 8.325,-38.35 8.325,-36.5 8.763,-36.062 8.763,-35.179 9.652,-34.29 J2.35@11.43,-34.29
GND: C1.2 C2.2 C4.2 C5.2 C6.2 C7.2 C8.2 C9.2 C10.2 C11.2 C12.2 C13.2 C14.2 C15.2 C16.2 C17.2 C18.2 C19.2 C20.2 C21.2 C22.2 C23.2 C24.2 C25.2 C26.2 C27.2 C28.2 C29.2 C30.2 C31.2 C32.2 C33.2 C34.2 C35.2 C39.2 C40.2 D1.2 D2.1 J1.A1 J1.A12 J1.B1 J1.B12 J2.1 J2.5 J2.33 J2.60 J7.2 K1.2 R2.2 R3.2 R15.2 SW1.3 SW2.4 SW3.4 U1.62 U1.81 U2.4 U3.4 U4.2 U4.3 U5.4 U6.1 U6.2 U6.3 U6.4 U8.5 U9.2 X1.2 X1.4 | length 156.1
  Top Layer w0.152: R2.2@-7.4,38.8 R3.2@-6.2,38.8 ; U8.5@-7.205,-30.725 -7.205,-29.405 v1(-7.2,-29.4) ; C35.2@-7.025,-32.9 v1(-7.025,-32.075) ; v1(-4.316,-7.801) v1@-4.287,-7.801 ; C39.2@-4.25,-23.3 v1(-3.478,-23.3) ; v1(-3.3,27.6) U9.2@-3.3,28.85 ; C21.2@-2.551,14.884 C21.2@-2.551,14.884 C22.2@-2.55,15.9 -2.55,16.375 -2.291,16.634 v1(-0.557,16.634) ; v1(-1.7,31.8) D2.1@-0.75,31.8 ; C19.2@-1.1,11.35 C20.2@-0.1,11.35 ; v1(-1,-12.9) -0.551,-12.9 ; v1(-1,-10.23) -0.551,-10.23 ; -0.1,12.1 C20.2@-0.1,11.35 ; v1(0.775,13.3) 0.775,11.748 0.377,11.35 C20.2@-0.1,11.35 ; C25.2@1.773,-9.325 1.773,-9.35 1.972,-9.549 1.997,-9.549 2.198,-9.75 ; v1(1.9,-15.7) 1.9,-15.251 1.933,-15.218 ; X1.4@2.198,-10.74 2.198,-9.75 ; v1(2.644,-9.325) 2.623,-9.325 2.198,-9.75 ; v1(3.4,-26.7) 4.715,-26.7 ; SW2.4@3.825,32.975 v1(4.925,32.975) ; 4.251,-12.852 v1(4.7,-12.852) ; 4.251,-10.2 v1(4.7,-10.2) ; U6.3@4.665,-25.275 4.665,-26.65 4.715,-26.7 ; C32.2@5.004,16.695 5.809,16.695 v1(5.817,16.688) ; v1(5.6,8.8) 5.686,8.714 5.686,8.528 5.9,8.313 C23.2@5.9,7.65 ; C9.2@5.9,5.85 6.549,5.85 6.626,5.773 C31.2@6.651,5.773 ; U6.2@5.935,-25.275 5.935,-26.635 6,-26.7 ; C10.2@6.3,11.35 7.25,11.35 v1(7.3,11.4) ; C31.2@6.651,5.873 6.85,5.674 ; v1(6.9,4.3) 6.875,4.325 6.875,4.975 C18.2@6.85,5 C31.2@6.85,6 6.85,6.35 6.937,6.437 6.937,6.516 7.1,6.679 v1(7.1,6.8) ; U6.1@7.205,-25.275 7.205,-26.395 6.9,-26.7 6,-26.7 ; 4.715,-26.7 6,-26.7
  Top Layer w0.2: v1(-8.354,0.479) C27.2@-7.611,0.479 ; v1(-8.354,2.638) C12.2@-7.611,2.638 ; v1(-8.291,-3.238) -8.291,-2.941 -7.95,-2.6 -7.925,-2.6 -7.75,-2.425 C13.2@-7.75,-2.4 ; R3.2@-6.195,38.8 v1(-6.195,39.841) ; v1(-5.9,6.8) -5.841,6.8 -5.583,7.058 C7.2@-4.944,7.058 ; v1@-4.287,-7.801 C14.2@-3.593,-7.106 ; v1(-2.055,-9.3) -2.055,-8.741 C15.2@-1.561,-8.246 ; C11.2@-0.379,8.496 0.602,8.496 v1(0.612,8.506) C8.2@0.612,7.581 ; v1(-0.328,-6.709) -0.328,-7.165 -0.1,-7.393 -0.1,-9.3 -0.528,-9.728 -0.528,-12.908 ; C29.2@1.45,-7.21 1.45,-7.801 1.844,-8.195 2.517,-8.195 ; X1.4@2.198,-10.74 2.198,-10.865 1.773,-11.29 1.771,-11.29 1.272,-11.789 1.272,-12.119 0.901,-12.49 0.873,-12.49 0.448,-12.915 X1.2@0.448,-13.04 ; v1(2.517,-7.649) 2.517,-8.195 ; U1.62@3.4,4.9 3.4,5.42 3.605,5.625 4.03,5.625 4.477,6.072 C24.2@4.477,6.804 4.544,6.871 5.137,6.871 5.254,6.989 5.254,7.546 v1(5.2,7.6) ; C24.2@4.477,6.939 C30.2@4.477,8.303 5.103,8.303 v1(5.6,8.8) ; C16.2@6.451,-5.406 6.451,-6.172 v1(6.454,-6.175) ; C17.2@7.416,-5.406 7.416,-6.172 v1(7.419,-6.175) ; C6.2@7.945,-0.489 7.949,-0.493 7.949,-1.219 v1(7.952,-1.222) ; C28.2@7.945,0.476 7.952,0.484 v1(7.952,1.216) ; -0.528,-12.908 -0.528,-14.172 0.518,-15.218 1.426,-15.218 ; -0.528,-12.908 -0.411,-13.025 0.433,-13.025 X1.2@0.448,-13.04 ; X1.2@0.448,-13.04 0.448,-14.031 0.698,-14.281 0.723,-14.281 0.898,-14.456 C26.2@0.898,-14.481 0.898,-15.198 0.918,-15.218 1.426,-15.218 ; 1.426,-15.218 1.933,-15.218 2.949,-15.218 4.244,-13.922 4.244,-9.249 3.19,-8.195 2.517,-8.195
  Top Layer w0.5: v1(-8.28,19.685) -8.277,19.682 C4.2@-7.374,19.682 ; v1@-4.392,24.838 -3.868,24.314 -3.311,24.314 U2.4@-3.286,24.289 -3.276,24.279 -2.476,24.279 v1(-1.866,23.669) -1.866,22.854 -1.866,20.053 v1(-2.051,19.868) -2.237,19.682 C5.2@-2.887,19.682 ; K1.2@-3.425,-36.5 -0.227,-36.5 -0.027,-36.7 v1(0,-36.7) ; v1(-0.702,28.443) -0.7,28.44 C1.2@-0.7,27.58 ; v1(-0.557,16.634) D1.2@1.191,16.634 ; C40.2@0,29.4 0.86,29.4 v1(0.863,29.402) ; v1(0.898,28.453) 0.9,28.45 C2.2@0.9,27.59 ; U6.4@3.395,-25.275 3.395,-26.695 v1(3.4,-26.7) ; C33.2@6,38.55 6.002,38.548 6.352,38.548 6.352,38.388 6.45,38.29 R15.2@7.7,38.29 ; v1(6.1,39.6) 6.097,39.597 6.097,38.825 C33.2@6.352,38.825 ; v1(6.85,-34.425) 7.2,-34.075 C34.2@7.2,-33.25
  Bottom Layer w0.152: v1(0,-36.7) J7.2@0,-35.45 ; U4.3@7.2,2.25 7.302,2.352 7.639,2.352 ; v1(7.952,1.216) 7.952,2.039 7.639,2.352 ; U4.2@8.15,4.55 8.15,2.863 7.639,2.352
  Bottom Layer w0.185: v1(0.457,-3.302) 0.457,-3.341 0.756,-3.64
  Bottom Layer w0.2: U3.4@-8.401,12.852 -7.077,12.852 v1(-7.075,12.85) ; v1(0,-36.7) 1.368,-36.7 2.231,-35.837 2.548,-35.837 2.554,-35.831 6.689,-35.831 8.029,-34.491 8.029,-9.885 2.719,-4.575 1.691,-4.575 0.756,-3.64 ; 0.369,-2.99 0.369,-3.214 v1(0.457,-3.302)
  other v1: 7.7,-37.325 1.778,2.54 -6.426,18.11 1.778,22.149 4.445,22.149 -4.608,24.838 -6.1,33 -0.127,38.151
  other v2: -1.35,-1.35 0,-1.35 1.35,-1.35 -1.35,0 0,0 1.35,0 -1.35,1.35 0,1.35 1.35,1.35
GP0: J2.6 U1.77 | length 28.1
  Top Layer w0.152: J2.6@-11.43,26.67 -9.599,24.839 -9.599,18.512 -9.5,18.413 -8.278,17.191 -8.278,6.802 -7.66,6.185 -5.415,6.185 -5.223,6.377 -3.495,6.377 -2.6,5.482 U1.77@-2.6,4.9
GP1: J2.7 U1.78 | length 25.4
  Top Layer w0.152: J2.7@-11.43,24.13 -9.904,22.604 -9.904,18.386 -8.583,17.065 -8.583,6.676 -7.787,5.88 -5.285,5.88 -5.092,6.072 -3.621,6.072 -3,5.451 U1.78@-3,4.9
GP2: J2.8 U1.79 | length 22.7
  Top Layer w0.152: J2.8@-11.43,21.59 -10.209,20.369 -10.209,20.153 -10.209,18.26 -8.888,16.939 -8.888,6.55 -7.913,5.575 -5.158,5.575 -4.966,5.767 -3.747,5.767 -3.4,5.42 U1.79@-3.4,4.9
GP3: J2.9 U1.80 | length 19.6
  Top Layer w0.152: J2.9@-11.43,19.05 -9.193,16.813 -9.193,6.424 -8.039,5.27 -5.829,5.27 -5.458,4.9 U1.80@-3.8,4.9
GP4: J2.10 U1.1 | length 16.6
  Top Layer w0.152: J2.10@-11.43,16.51 -9.497,14.577 -9.497,6.297 -8.2,5 -8.165,4.965 -6.72,4.965 -5.555,3.8 U1.1@-4.9,3.8
GP5: J2.11 U1.2 | length 14.5
  Top Layer w0.152: J2.11@-11.43,13.97 -9.802,12.342 -9.802,6.164 -8.333,4.695 -8.326,4.695 -8.292,4.661 -6.846,4.661 -5.586,3.4 U1.2@-4.9,3.4
GP6: J2.12 U1.3 | length 12.4
  Top Layer w0.152: J2.12@-11.43,11.43 -10.107,10.107 -10.107,6.038 -8.459,4.39 -8.453,4.39 -8.418,4.356 -6.973,4.356 -5.617,3 U1.3@-4.9,3
GP7: J2.13 U1.4 | length 10.3
  Top Layer w0.152: J2.13@-11.43,8.89 -10.412,7.872 -10.412,5.912 -8.586,4.086 -8.579,4.086 -8.544,4.051 -7.099,4.051 -5.648,2.6 U1.4@-4.9,2.6
GP8: J2.14 U1.6 | length 9.5
  Top Layer w0.152: J2.14@-11.43,6.35 -10.287,5.207 -10.287,3.301 -9.002,2.016 -6.089,2.016 -5.873,1.8 U1.6@-4.9,1.8
GP9: J2.15 U1.7 | length 7.5
  Top Layer w0.152: J2.15@-11.43,3.81 -9.331,1.711 -6.215,1.711 -5.904,1.4 U1.7@-4.9,1.4
GP10: J2.16 U1.8 | length 6.8
  Top Layer w0.152: J2.16@-11.43,1.27 -9.448,1.27 -9.312,1.406 -6.341,1.406 -5.935,1 U1.8@-4.9,1
GP11: J2.17 U1.9 | length 7.7
  Top Layer w0.152: J2.17@-11.43,-1.27 -9.058,1.102 -6.467,1.102 -5.966,0.6 U1.9@-4.9,0.6
GP12: J2.18 U1.11 | length 8.4
  Top Layer w0.152: J2.18@-11.43,-3.81 -10.714,-3.094 -10.714,-2.514 -9,-0.8 -6.357,-0.8 -5.757,-0.2 U1.11@-4.9,-0.2
GP13: J2.19 U1.12 | length 10.5
  Top Layer w0.152: J2.19@-11.43,-6.35 -10.389,-5.309 -10.389,-2.626 -8.872,-1.109 -8.84,-1.109 -8.836,-1.105 -6.231,-1.105 -5.726,-0.6 U1.12@-4.9,-0.6
GP14: J2.20 U1.13 | length 12.6
  Top Layer w0.152: J2.20@-11.43,-8.89 -10.084,-7.544 -10.084,-2.753 -8.745,-1.414 -8.714,-1.414 -8.71,-1.41 -6.105,-1.41 -5.695,-1 U1.13@-4.9,-1
GP15: J2.21 U1.14 | length 14.7
  Top Layer w0.152: J2.21@-11.43,-11.43 -9.779,-9.779 -9.779,-2.879 -8.619,-1.719 -7.243,-1.719 -5.983,-1.719 -5.664,-1.4 U1.14@-4.9,-1.4
GP16: J2.22 U1.16 | length 14.8
  Top Layer w0.152: J2.22@-11.43,-13.97 -7.899,-10.439 -7.899,-4.577 -5.522,-2.2 U1.16@-4.9,-2.2
GP17: J2.23 U1.17 | length 17
  Top Layer w0.152: J2.23@-11.43,-16.51 -7.595,-12.675 -7.595,-4.704 -5.491,-2.6 U1.17@-4.9,-2.6
GP18: J2.24 U1.18 | length 19.1
  Top Layer w0.152: J2.24@-11.43,-19.05 -7.29,-14.91 -7.29,-4.83 -5.46,-3 U1.18@-4.9,-3
GP19: J2.25 U1.19 | length 21.2
  Top Layer w0.152: J2.25@-11.43,-21.59 -6.985,-17.145 -6.985,-4.956 -5.429,-3.4 U1.19@-4.9,-3.4
GP20: J2.26 U1.20 | length 23
  Top Layer w0.152: J2.26@-11.43,-24.13 -6.68,-19.38 -6.68,-6.863 -4.9,-5.083 U1.20@-4.9,-3.8
GP21: J2.27 U1.21 | length 25.2
  Top Layer w0.152: J2.27@-11.43,-26.67 -6.375,-21.615 -6.375,-6.989 -4.286,-4.9 U1.21@-3.8,-4.9